# Altium PCB cooling_shield.PcbDoc
Units mil, origin at the board's own origin, x right, y up, seen from the top; angles counter-clockwise.
Board outline 5955.5 x 3149.6 mil, 2 copper layers (Top Layer, Bottom Layer), stack 62.192 mil thick; 10 components, 7 nets, 41 pads, 1 vias.
Unrouted connection lines stored in the file: 6.
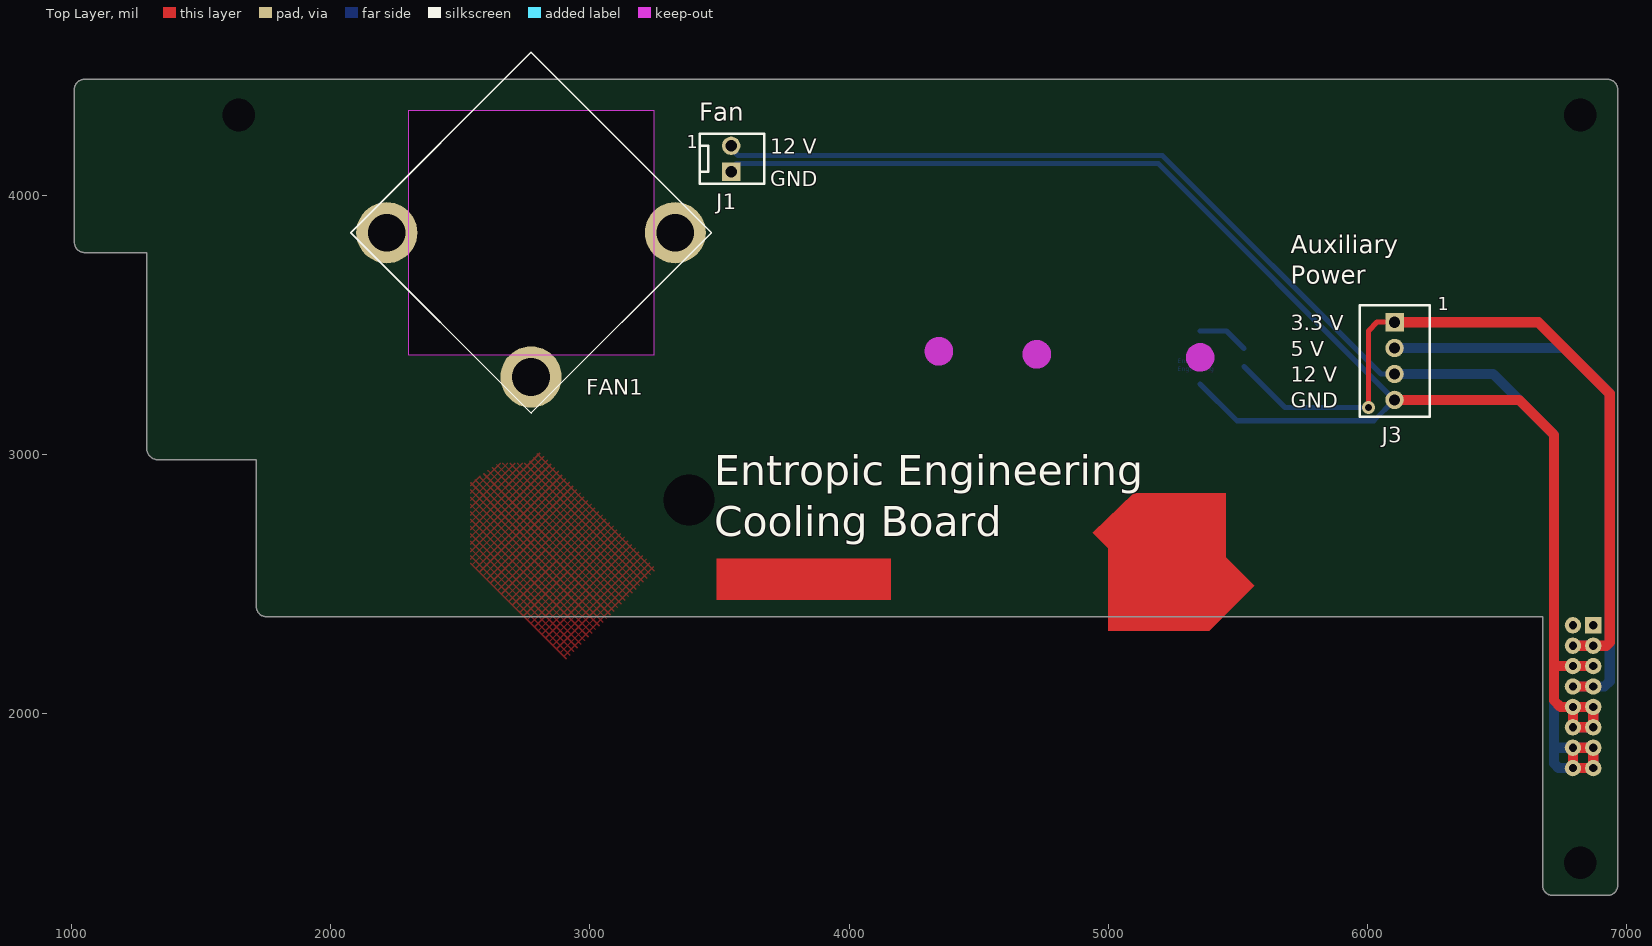
[diagram p0: Top Layer view]
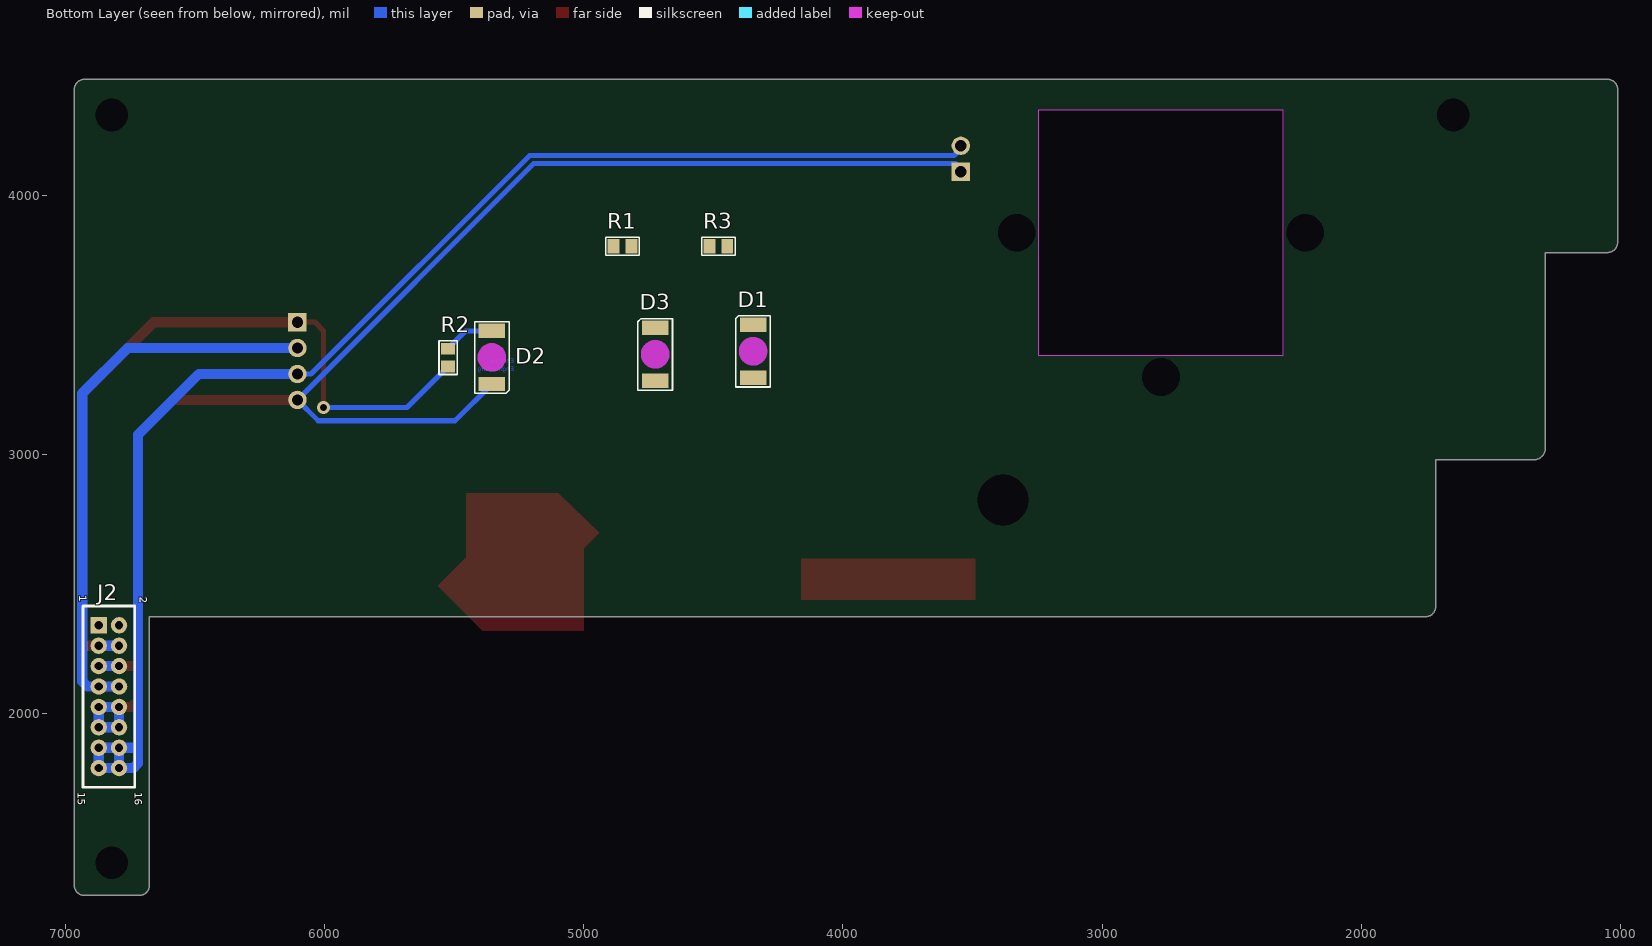
[diagram p1: Bottom Layer view, seen from below]

## Layer stack, top to bottom
Top Solder: solder mask 0.4, Solder Resist, Dk 3.5
Top Layer: signal copper 1.4
Dielectric 1: core 59.3921, FR-4, Dk 4.2
Bottom Layer: signal copper 1.4
Bottom Solder: solder mask 0.4, Solder Resist, Dk 3.5

## Board outline
1289.69,3030.09 1289.69,3778.13 1053.47,3778.13 cw(c1051.57,3819.4) 1010.3,3817.5 1010.3,4407.87 cw(c1049.67,4407.87) 1049.67,4447.24 6926.43,4447.24 cw(c6926.43,4407.87) 6965.8,4407.87 6965.8,1337.01 cw(c6926.43,1337.01) 6926.43,1297.64 6715.17,1297.64 cw(c6715.17,1337.01) 6675.8,1337.01 6675.8,2373.06 1751.87,2373.06 cw(c1751.87,2412.43) 1712.5,2412.43 1712.5,2979.12 1329.06,2979.12 cw(c1334.86,3024.29)
cut-out: 2300.41,3382.76 2300.41,4327.68 3245.29,4327.68 3245.29,3382.8

## Design rules (kind name [scope] priority, off if disabled: settings)
Clearance [All] p1: gap=10 ignorepadtopadclearanceinfootprint=FALSE except(0: Arc-Hole Track-Hole SMDPad-Hole THPad-Hole Via-Hole Fill-Hole Poly-Hole Region-Hole Text-Hole)
PolygonConnect [All] p1: connectstyle=Relief reliefconductorwidth=10 reliefentries=4 polygonreliefangle="90 Angle" airgapwidth=10
RoutingVias [All] p1: holewidth=19.68 width=39.37 viastyle="Through Hole" minholewidth=7.87 minwidth=17.72 maxholewidth=248.03 maxwidth=275.59
SolderMaskExpansion [All] p1: expansion=4
Width [All] p1: maxlimit=196.85 minlimit=10 preferedwidth=10
30 further rules are at their usual default settings.

## Components (designator, comment, footprint, x,y, rotation, side; value= is the part's Value field where it differs from the comment)
D1 "XZFBB45S-9" PLCC-2 4346.46,3397.64 r90 bottom
D2 "XZFBB45S-9" PLCC-2 5354.33,3374.02 r270 bottom
D3 "XZFBB45S-9" PLCC-2 4724.41,3385.83 r90 bottom
FAN1 "fan" fan 2772.83,3855.22 r225 top
J1 "Fan" 1718561002 3545,4140.63 r90 top
J2 "DF11-16DP-2DSA(01)" DF11-16DP-2DSA(01)_FLIP 6832.3,2064.64 r270 bottom locked
J3 "Power" 282834-4 6105,3360 r270 top
R1 "0" RESC2012X07N_SAMSUNG 4850.41,3803.15 r180 bottom
R2 "0" RESC2012X07N_SAMSUNG 5523.62,3373.03 r270 bottom
R3 "0" RESC2012X07N_SAMSUNG 4480.33,3803.15 r180 bottom

## Footprints (in the part's own frame and the unit in brackets; to place one, negate y for a bottom-side part, rotate by r counter-clockwise, add the part's x,y. Pads: shape width x height; smd on the part's side, far side on the other; paste and mask are expansions set on the pad)
282834-4 [mm]
  rect 1.8x1.8 hole 1.1: 1(-3.81,0)
  round 1.8 hole 1.1: 2(-1.27,0) 3(1.27,0) 4(3.81,0)
  silkscreen extent -5.46,-3.43 5.46,3.43, body extent -5.31,-3.25 5.31,3.25, height 10
1718561002 [mm]
  round 1.8 hole 1.14: 1(1.27,0)
  rect 1.8x1.8 hole 1.14: 2(-1.27,0)
  silkscreen extent -2.46,-3.25 2.46,3.1, body extent -2.46,-3.25 2.46,3.1, height 10.62
DF11-16DP-2DSA(01)_FLIP [mm]
  rect 1.6x1.6 hole 0.8: 1(-7,-1)
  round 1.6 hole 0.8: 2(-7,1) 3(-5,-1) 4(-5,1) 5(-3,-1) 6(-3,1) 7(-1,-1) 8(-1,1) 9(1,-1) 10(1,1) 11(3,-1) 12(3,1) 13(5,-1) 14(5,1) 15(7,-1) 16(7,1)
  silkscreen extent -8.89,-2.54 8.89,2.54, body extent -8.93,-2.6 9.07,2.4, height 6.63
fan [mm] "25mm fan"
  round 6 / inner round 0 / far side round 0 hole 3.7 unplated: 1(-10,10) 2(10,10) 3(10,-10)
  silkscreen extent -12.5,-12.5 12.5,12.5, body extent -12.55,-12.55 12.55,12.55, height 18.12
PLCC-2 [mm] "Reverse gullwing LED"
  rect 1.4x2.6 smd paste-10: 1(-2.6,0) 2(2.6,0)
  Keep-Out Layer circle w1.6: c0,0 r0.6
  silkscreen extent -3.5,-1.7 3.5,1.7, body extent -2.58,-1.4 2.62,1.4, height 1.87
RESC2012X07N_SAMSUNG [mm] "Chip Resistor, 2-Leads, Body 2.00x1.25mm, IPC Medium Density"
  rect 1.15x1.4 smd: 1(-0.875,0) 2(0.875,0)
  silkscreen extent -1.65,-0.89 1.65,0.89, body extent -1.1,-0.7 1.1,0.7, height 0.65

## Part data
D1 D2 D3: "LED BLUE CLEAR 2PLCC SMD", Color=Blue, Current - Test=20mA, Lens Color=Colorless, Manufacturer=SunLED, Millicandela Rating=447mcd, Package / Case="2-SMD, Z-Bend", Supplier Device Package=2-PLCC, Supplier Part Number 1=1497-1233-1-ND, Voltage - Forward (Vf) (Typ)=3.3V, Category=Optoelectronics, ComponentLink1Description=http://www.sunledusa.com/products/spec/XZFBB45S-9.pdf, ComponentLink1URL=http://www.sunledusa.com/products/spec/XZFBB45S-9.pdf, Configuration=Standard, Features=-, Height (Max)=1.90mm, Lens Size="2.40mm Dia", Lens Style="Round with Flat Top", Lens Transparency=Clear, Manufacturer Part Number=XZFBB45S-9, Mounting Type="Surface Mount, Bottom Entry", Packaging="Cut Tape (CT)", Part Status=Active, Pricing 1="1=0.83, 10=0.651, 25=0.5456, 100=0.4752, 250=0.4224, 500=0.3696, 1000=0.2992 (USD)", RoHS="RoHS Compliant", Size / Dimension="3.20mm L x 2.80mm W", Stock 1=5275, Supplier 1=Digi-Key, Viewing Angle=120°, Wavelength - Dominant=470nm, Wavelength - Peak=465nm
FAN1: "RND STANDOFF M2.5X0.45 STEEL 8MM", Manufacturer="Wurth Electronics", Manufacturer Part Number=9774080151R, Supplier Part Number 1=732-7110-1-ND, Length=0.37inch, Material=Steel, Outside Diameter=0.201inch, Plating=Tin, Pricing 1="1=0.95, 10=0.918, 50=0.795, 100=0.739 (USD)", REACH SVHC=Unknown, Stock 1=236, Supplier 1=Digi-Key, Threaded/Unthreaded=Threaded
J1: library part 1718561002, "Headers & Wire Housings KK Hdr Vrt 2 Ckt 2.54mm Pitch 15um Au", Color=Black, Current Rating=4A, Flammability Rating="UL94 V-2", Manufacturer=Molex, Max Operating Temperature=105°C, Min Operating Temperature=-40°C, Package Quantity=6000, Supplier Part Number 1=WM10286-ND, Voltage Rating=250V, ComponentLink1Description=http://www.mouser.com/ds/2/276/1718561002_PCB_HEADERS-294894.pdf?src-supplier=Mouser, ComponentLink1URL=http://www.mouser.com/ds/2/276/1718561002_PCB_HEADERS-294894.pdf?src-supplier=Mouser, Connector Type="Male Pin", Contact Gender=Male, Contact Material=Brass, Contact Mating Length=0.293inch, Contact Plating=Gold, Contact Post Length=2.34mm, Fastening Type=Friction, Glow Wire Compliant=Compliant, Halogen Free="Low Halogen", Housing Material=Nylon, Manufacturer Part Number=1718561002, Mount="Through Hole", Number of Circuits=2, Number of Contacts=2, Number of Positions=2, Number of Rows=1, Orientation=Vertical, Packaging=Bulk, Pitch=2.54mm, Pricing 1="1=0.45, 10=0.426, 100=0.2979, 500=0.2554, 1000=0.2128, 5000=0.1824, 10000=0.1702 (USD)", Radiation Hardening=No, Stock 1=499, Supplier 1=Digi-Key, Termination=Solder, Weight=0.007549oz
J2: "Headers & Wire Housings 2MM V PCB HEADER 16P DR THRU-HOLE GLD", Current Rating="2 A", Manufacturer="Hirose Connector", Supplier Part Number 1=H2856-ND, Voltage Rating="250 V", Brand="Hirose Connector", Category="Headers & Wire Housings", ComponentLink1Description=http://www.mouser.com/datasheet/2/185/DF11_catalog-939040.pdf, ComponentLink1URL=http://www.mouser.com/datasheet/2/185/DF11_catalog-939040.pdf, Contact Material=Brass, Contact Plating=Gold, Manufacturer Part Number=DF11-16DP-2DSA(01), Minimum Order Quantity=1, Mounting Angle=Vertical, Mounting Style=-, Number of Positions="16 Position", Number of Rows="2 Row", Packaging=Bulk, Pitch="2 mm", Product=Headers, Reeling=False, RoHS="RoHS Compliant", RoHS - Mouser=Y, Series=DF11, Standard Pack Qty=100, Supplier 1=Digi-Key, Termination Style="Through Hole", Type=Shrouded
J3: library part 282834-4, "4 Position Wire to Board Terminal Block", Supplier Part Number 1=A98335-ND, Supplier 1=Digi-Key
R1 R2 R3: library part RC2012J000CS, "Res Thick Film 0805 0 Ohm Molded SMD T/R", Case/Package=0805, Case Code (Metric)=2012, Manufacturer=Samsung, Max Operating Temperature=155°C, Max Power Dissipation=125mW, Min Operating Temperature=-55°C, Resistance=0mR, Supplier Part Number 1=1276-5466-1-ND, Temperature Coefficient=200ppm/°C, Tolerance=5%, Case Code (Imperial)=0805, ComponentLink1Description=https://www.verical.com/server-webapp/html/getDatasheet?partID=666031&src-supplier=Verical, ComponentLink1URL=https://www.verical.com/server-webapp/html/getDatasheet?partID=666031&src-supplier=Verical, ComponentLink2Description=http://www1.futureelectronics.com/doc/SAMSUNG%20PASSIVE/SAMSUNG%20PASSIVE%20RC1608F4303CS.pdf?src-supplier=Future+Electronics, ComponentLink2URL=http://www1.futureelectronics.com/doc/SAMSUNG%20PASSIVE/SAMSUNG%20PASSIVE%20RC1608F4303CS.pdf?src-supplier=Future+Electronics, ComponentLink3Description=http://www.samsungsem.com/kr/support/product-search/chip-resistor/RC2012J000CS.jsp?src-supplier=Digi-Key, ComponentLink3URL=http://www.samsungsem.com/kr/support/product-search/chip-resistor/RC2012J000CS.jsp?src-supplier=Digi-Key, ComponentLink4Description=http://datasheet.iiic.cc/samsung_[electro-mechanics]/RC2012J000CS.pdf?src-supplier=IIIC, ComponentLink4URL=http://datasheet.iiic.cc/samsung_[electro-mechanics]/RC2012J000CS.pdf?src-supplier=IIIC, Composition="Thick Film", Contact Plating=Tin, Depth=1.25mm, Features="Moisture Resistant", Height=0.024inch, Length=2mm, Manufacturer Part Number=RC2012J000CS, Military Standard=Not, Mount="Surface Mount", Number of Terminations=2, Packaging="Tape and Reel", Power Rating=125mW, Pricing 1="1=0.1, 10=0.052, 25=0.0372, 50=0.0284, 100=0.021, 250=0.016, 500=0.0128, 1000=0.0094 (USD)", Radiation Hardening=No, Stock 1=259132, Supplier 1=Digi-Key, Width=0.049inch

## Free pads (board coordinates)
  rect 0x0 hole 196.85: 2(3381.89,2822.83)
  round 70 hole 125.98 unplated mask+49.21: J1-18(1645.3,4309.64) J1-18(6820.8,1424.49) J1-18(6820.8,4309.64)

## Via types
v1: diameter 50, hole 28, Top Layer to Bottom Layer, tented both sides, 1 vias

## Nets (pads, with @x,y where several pads share a name; then routed paths per layer and width w, separated by ;. In a path a pad name is that pad's centre, name@x,y a point inside that pad or via, vN(x,y) a via of type N, cw(c..) or ccw(c..) an arc to the next point about the centre after c; other vN are vias at no path point)
3V3: J2.3 J2.4 J3.1 R1.2 R2.2 R3.2 | length 3085.9
  Top Layer w20: v1(6003.94,3181.11) 6003.94,3476.38 6037.56,3510 J3.1
  Top Layer w39.37: J3.1 6659.29,3510 6935,3234.29 6935,2275 6921.49,2261.49 J2.3 J2.4
  Bottom Layer w20: R2.2@5523.62,3339.17 5681.69,3181.11 v1(6003.94,3181.11)
  Bottom Layer w39.37: J2.4 J2.3
5V: J2.7 J2.8 J3.2 | length 2242.6
  Top Layer w39.37: J2.8 J2.7
  Bottom Layer w39.37: J3.2 6760,3410 6935,3235 6935,2123.98 6915.03,2104.01 J2.7 J2.8
12V: J1.1 J2.13 J2.14 J2.15 J2.16 J3.3 | length 5684.7
  Top Layer w39.37: J2.16 J2.14 J2.13 J2.15 J2.16
  Bottom Layer w20: J1.1@3545,4180 3571.46,4153.54 5208.66,4153.54 6052.2,3310 J3.3
  Bottom Layer w39.37: J3.3 6485.28,3310 6720,3075.28 6720,1870.08 ; 6720,1870.08 6722.29,1867.79 J2.14 ; 6720,1870.08 6720,1807.56 6738.51,1789.05 J2.16 ; J2.16 J2.15 J2.13 J2.14 ; J2.16 J2.14
GND: D1.2 D2.2 D3.2 J1.2 J2.5 J2.6 J2.9 J2.10 J2.11 J2.12 J3.4 | length 6429.6
  Top Layer w39.37: J3.4 6585,3210 6720,3075 6720,2181.1 ; J2.5 J2.6 6721.65,2182.75 6720,2181.1 ; 6720,2181.1 6720,2050 6744.73,2025.27 J2.10 ; J2.10 J2.9 J2.11 J2.12 J2.10
  Bottom Layer w20: J1.2@3545,4101.26 3565.79,4122.05 5192.95,4122.05 J3.4 6024.28,3129.28 5496.7,3129.28 D2.2
  Bottom Layer w39.37: J2.6 J2.5 ; J2.12 J2.11 J2.9 J2.10 J2.12
NetD1_1: D1.1 R1.1
NetD2_1: D2.1 R2.1 | length 197.3
  Bottom Layer w20: D2.1 5456.1,3476.38 R2.1@5523.62,3408.86
NetD3_1: D3.1 R3.1
pads on no net: FAN1.1 FAN1.2 FAN1.3 J2.1 J2.2

## Polygon pours and split planes (outlines as drawn)
no net on Top Layer "isolated" (hatched 45Degree grid 20 track 6, pour order 6): 2539.37,2889.76 2539.37,2578.74 2907.48,2210.63 3253.94,2557.09 2803.15,3007.87 2759.84,2964.57 2645.67,2964.57
no net on Top Layer "Top Layer-No Net" (solid, pour order 4): 7006,3835

## Other copper
Top Layer:
  rectangle: 3488.19,2437.01 4161.42,2598.43
  region: 4940.94,2696.85 5000,2637.8 5000,2318.9 5389.76,2318.9 5562.99,2492.13 5452.76,2602.36 5452.76,2850.39 5098.43,2850.39 5047.24,2799.21
Bottom Layer:
  text "Entropic / Engineering" at 5267.72,3314.96 h30

## Silkscreen, mask and mechanical layers (free items; w line width, h text height)
Top Overlay:
  text "Fan" at 3421.26,4263.78 h118.11
  text "12 V" at 3696.18,4140.63 h98.43
  text "GND" at 3696.18,4015.63 h98.43
  text "Auxiliary / Power" at 5705,3635 h118.11
  text "3.3 V" at 5705,3460 h98.43
  text "5 V" at 5705,3360 h98.43
  text "12 V" at 5705,3260 h98.43
  text "GND" at 5705,3160 h98.43
  text "Entropic Engineering / Cooling Board" at 3480.32,2645.67 h196.85
Bottom Solder:
  lines w20: 3940.94,4279.53 4488.19,2590.55
Mechanical 1:
  lines w0.5: 6733.88,1712.28 6930.73,2417 ; 6733.88,1712.28 6930.73,1712.28 ; 6733.88,1712.28 6733.88,2417 ; 6733.88,2417 6930.73,1712.28 ; 6733.88,2417 6930.73,2417 ; 6930.73,1712.28 6930.73,2417
Mechanical 3:
  circle w0.5: c6820.8,1424.49 r60
  circle w0.5: c1645.3,4309.64 r60
  circle w0.5: c6820.8,4309.64 r60
  lines w0.5: 2300.41,3382.77 2300.41,4327.68 3245.29,4327.68 3245.29,3382.8 ; 1010.3,3817.5 ccw(c1051.57,3819.4) 1053.47,3778.13 1289.69,3778.13 1289.69,3030.09 ccw(c1334.87,3024.3) 1329.06,2979.12 1712.5,2979.12 1712.5,2412.43 ccw(c1751.87,2412.43) 1751.87,2373.06 6675.8,2373.06 6675.8,1337.01 ccw(c6715.17,1337.01) 6715.17,1297.64 6926.43,1297.64 ccw(c6926.43,1337.01) 6965.8,1337.01 6965.8,4407.87 ccw(c6926.43,4407.87) 6926.43,4447.24 1049.67,4447.24 ccw(c1049.67,4407.87) 1010.3,4407.87 1010.3,3817.5
  text "ROUTE OUT BOARD CUTOUT" at 2430,3798 h60

## Text inside footprints (layer, text, board x,y; h text height)
J1: Top Overlay "1" at 3374.02,4181.1 h50
J2: Bottom Overlay "16" at 6732.28,1696.85 h30 r90; Bottom Overlay "15" at 6952.76,1696.85 h30 r90; Bottom Overlay "2" at 6713,2451 h30 r90; Bottom Overlay "1" at 6947,2456 h30 r90
J3: Top Overlay "1" at 6271.65,3555.12 h50